# Altium PCB WikiTFT-2.8.PcbDoc
Units mil, origin at the board's own origin, x right, y up, seen from the top; angles counter-clockwise.
Board outline 3945 x 3915 mil, 2 copper layers (Top Layer, Bottom Layer); 22 components, 48 nets, 171 pads, 141 vias.
Unrouted connection lines stored in the file: 35.
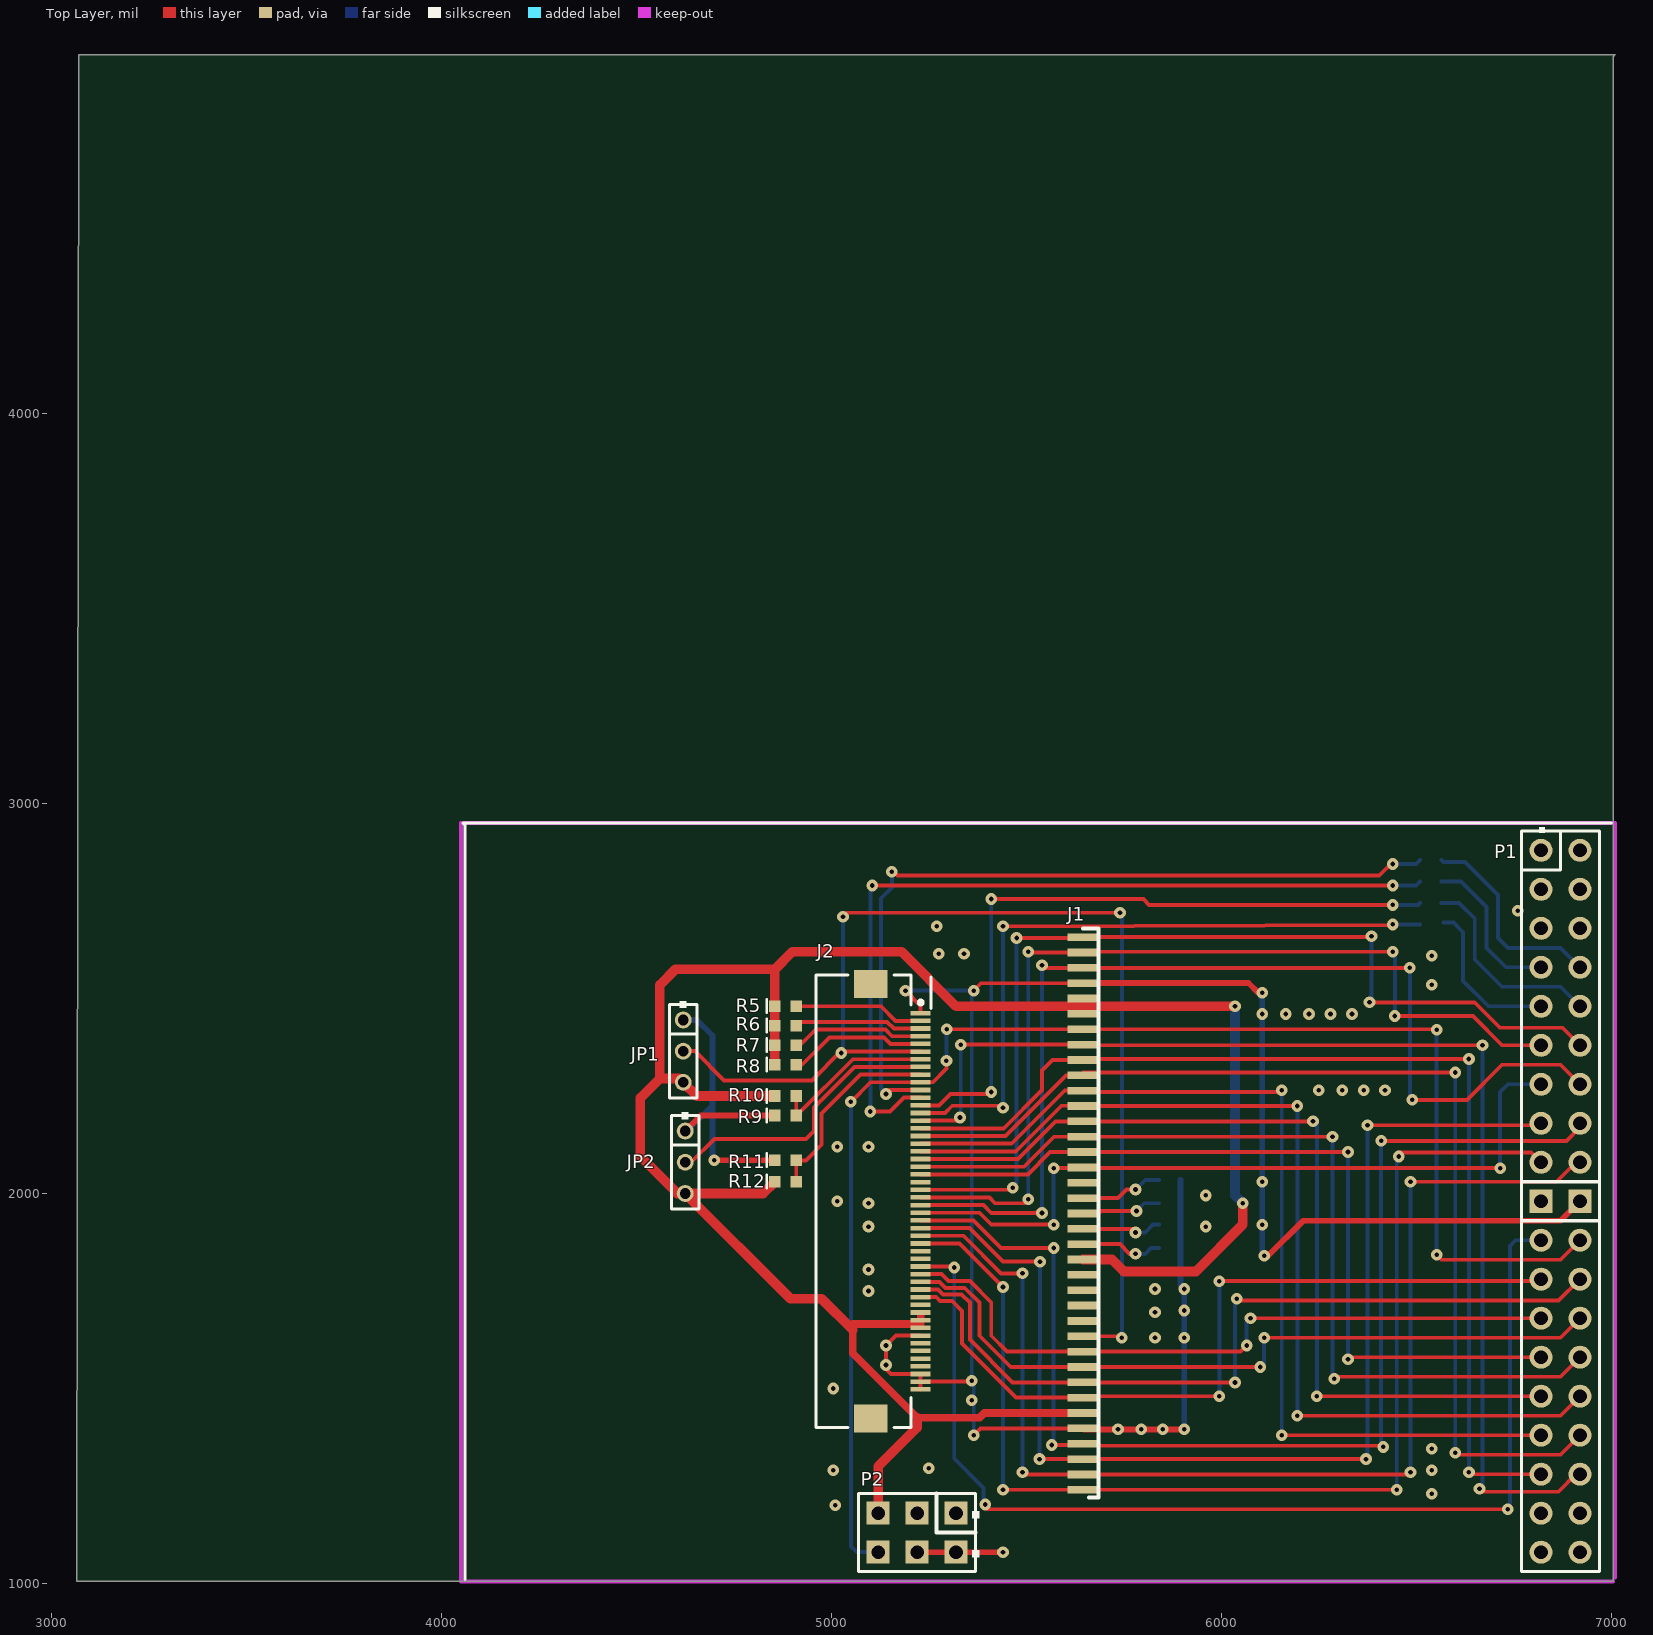
[diagram p0: Top Layer view]
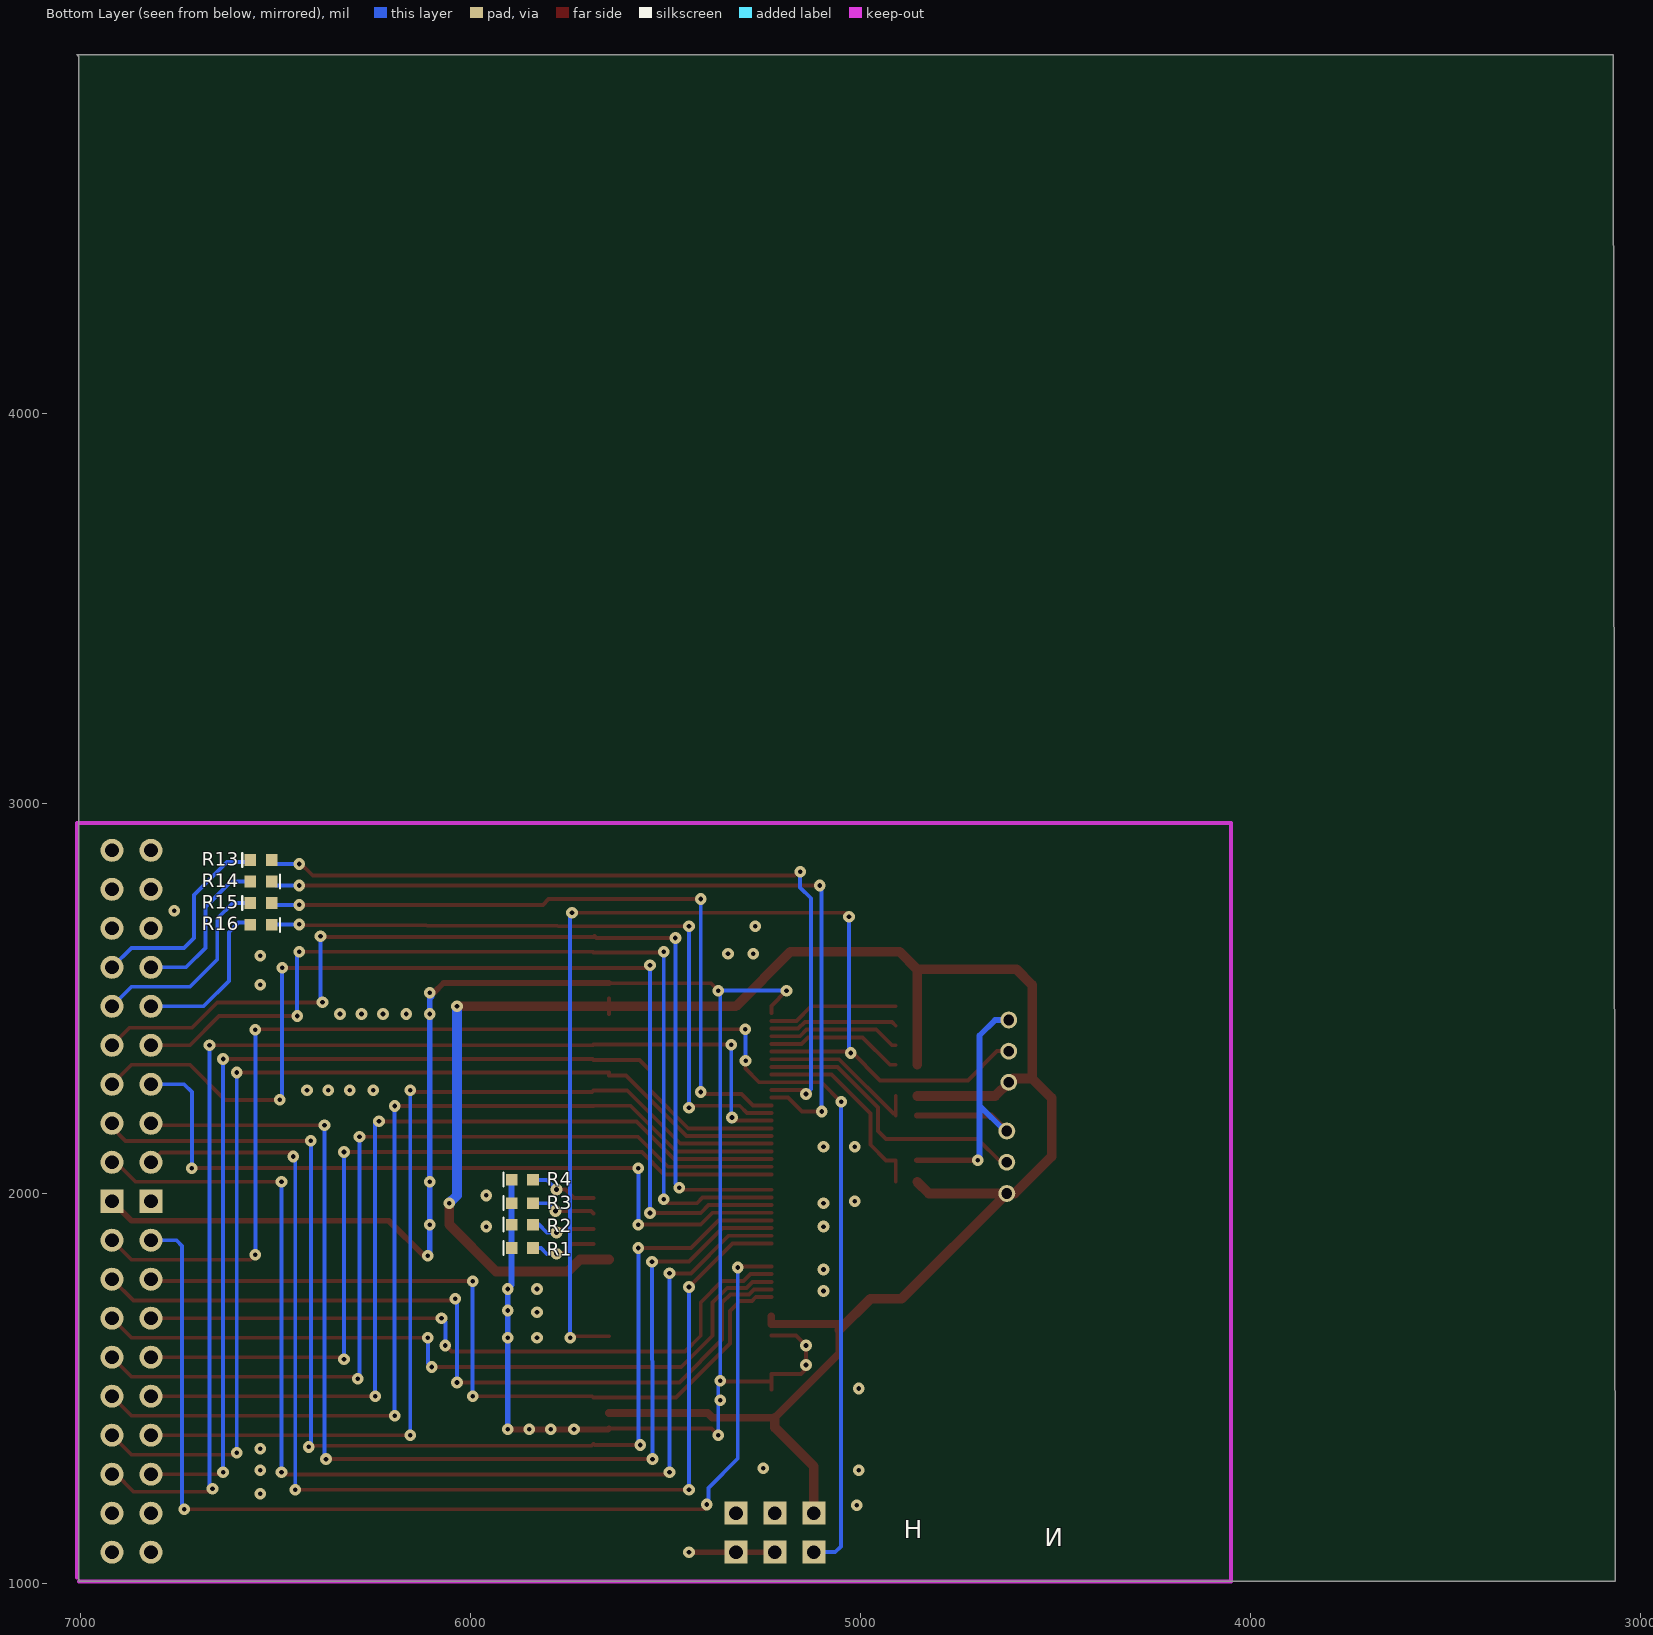
[diagram p1: Bottom Layer view, seen from below]

## Layer stack, top to bottom
Top Solder: solder mask 0.4, Solder Resist, Dk 3.5
Top Layer: signal copper 1.4
Dielectric1: dielectric 12.6, FR-4, Dk 4.8
Bottom Layer: signal copper 1.4
Bottom Solder: solder mask 0.4, Solder Resist, Dk 3.5

## Board outline
3070,4920 7010,4920 7005,4915 7005,1005 3065,1005

## Design rules (kind name [scope] priority, off if disabled: settings)
Clearance [All] p1: gap=7
PolygonConnect [All] p1: connectstyle=Relief reliefconductorwidth=10 reliefentries=4 polygonreliefangle="90 Angle" airgapwidth=10
RoomDefinition TFT [InComponentClass('TFT')] p1: confinementstyle=ConfineIn formatcopy=TRUE lockcomponents=FALSE outline 4060,1005 6995,1005 6995,2955 4060,2955
RoutingVias [All] p1: holewidth=28 width=50 viastyle="Through Hole" minholewidth=10 minwidth=20 maxholewidth=12 maxwidth=30
SolderMaskExpansion [All] p1: expansion=4
UnpouredPolygon [All] p1: allowunpoured=FALSE
Width [All] p1: maxlimit=25 minlimit=10 preferedwidth=12 minimp=50.000000 maximp=50.000000 favimp=50.000000
29 further rules are at their usual default settings.

## Components (designator, comment, footprint, x,y, rotation, side; value= is the part's Value field where it differs from the comment)
J1 "TFT-2.8-240x320-i9320" TFT-PIN37-1.0MM 5645,1240 r90 top
J2 "TFT-2.8-240x320-i9341" FPC-0.5-PIN50 5165,1980 r270 top
JP1 "Jumper3" HDR1X3/2.00mm 4620,2445 r270 top
JP2 "Jumper3" HDR1X3/2.00mm 4625,2160 r270 top
P1 "WIKIGPIO-FULL" WIKIGPIO-FULL 6820,2880 r270 top
P2 "WIKIPWR" WIKIPWR 5320,1180 r180 top
R1 "NA" 0603M 5895,1860 r180 bottom
R2 "NA" 0603M 5895,1920 r180 bottom
R3 "NA" 0603M 5895,1975 r180 bottom
R4 "NA" 0603M 5895,2035 r180 bottom
R5 "NA" 0603M 4855,2480 r0 top
R6 "NA" 0603M 4855,2430 r0 top
R7 "NA" 0603M 4855,2380 r0 top
R8 "NA" 0603M 4855,2330 r0 top
R9 "NA" 0603M 4855,2200 r0 top
R10 "NA" 0603M 4855,2250 r0 top
R11 "NA" 0603M 4855,2085 r0 top
R12 "NA" 0603M 4855,2030 r0 top
R13 "NA" 0603M 6565,2855 r180 bottom
R14 "NA" 0603M 6510,2800 r0 bottom
R15 "NA" 0603M 6565,2745 r180 bottom
R16 "NA" 0603M 6510,2689.13 r0 bottom

## Footprints (in the part's own frame and the unit in brackets; to place one, negate y for a bottom-side part, rotate by r counter-clockwise, add the part's x,y. Pads: shape width x height; smd on the part's side, far side on the other; paste and mask are expansions set on the pad)
0603M [mil]
  rect 30x30 smd: 1(0,0) 2(55,0)
  silkscreen extent -21,-17 -21,18, body extent -5,-15 60,15, height 43
FPC-0.5-PIN50 [mm] "Connector; FH12 Series; 50 Position; 0.5mm Spaced Top Contact"
  rect 0.3x1.3 smd: 1(-12.25,1.625) 2(-11.75,1.625) 3(-11.25,1.625) 4(-10.75,1.625) 5(-10.25,1.625) 6(-9.75,1.625) 7(-9.25,1.625) 8(-8.75,1.625) 9(-8.25,1.625) 10(-7.75,1.625) 11(-7.25,1.625) 12(-6.75,1.625) 13(-6.25,1.625) 14(-5.75,1.625) 15(-5.25,1.625) 16(-4.75,1.625) 17(-4.25,1.625) 18(-3.75,1.625) 19(-3.25,1.625) 20(-2.75,1.625) 21(-2.25,1.625) 22(-1.75,1.625) 23(-1.25,1.625) 24(-0.75,1.625) 25(-0.25,1.625) 26(0.25,1.625) 27(0.75,1.625) 28(1.25,1.625) 29(1.75,1.625) 30(2.25,1.625) 31(2.75,1.625) 32(3.25,1.625) 33(3.75,1.625) 34(4.25,1.625) 35(4.75,1.625) 36(5.25,1.625) 37(5.75,1.625) 38(6.25,1.625) 39(6.75,1.625) 40(7.25,1.625) 41(7.75,1.625) 42(8.25,1.625) 43(8.75,1.625) 44(9.25,1.625) 45(9.75,1.625) 46(10.25,1.625) 47(10.75,1.625) 48(11.25,1.625) 49(11.75,1.625) 50(12.25,1.625)
  rect 1.8x2.2 smd: 51(14.15,-1.625) 52(-14.15,-1.625)
  silkscreen extent -14.75,-5.2 14.75,1.75
HDR1X3/2.00mm [mm]
  round 1.1 hole 0.7: 1(0,0) 2(2.032,0) 3(4.064,0)
  silkscreen extent -1.24,-0.89 5.08,0.89
TFT-PIN37-1.0MM [mm]
  rect 0.5x2 smd: 1(0,0) 2(1,0) 3(2,0) 4(3,0) 5(4,0) 6(5,0) 7(6,0) 8(7,0) 9(8,0) 10(9,0) 11(10,0) 12(11,0) 13(12,0) 14(13,0) 15(14,0) 16(15,0) 17(16,0) 18(17,0) 19(18,0) 20(19,0) 21(20,0) 22(21,0) 23(22,0) 24(23,0) 25(24,0) 26(25,0) 27(26,0) 28(27,0) 29(28,0) 30(29,0) 31(30,0) 32(31,0) 33(32,0) 34(33,0) 35(34,0) 36(35,0) 37(36,0)
  silkscreen extent -0.51,-1.02 36.58,0
WIKIGPIO-FULL [mm] "Connector; Header; 19x2 Position"
  round 1.5 hole 0.9: 1(0,0) 2(0,2.54) 3(2.54,0) 4(2.54,2.54) 5(5.08,0) 6(5.08,2.54) 7(7.62,0) 8(7.62,2.54) 9(10.16,0) 10(10.16,2.54) 11(12.7,0) 12(12.7,2.54) 13(15.24,0) 14(15.24,2.54) 15(17.78,0) 16(17.78,2.54) 17(20.32,0) 18(20.32,2.54) 21(25.4,0) 22(25.4,2.54) 23(27.94,0) 24(27.94,2.54) 25(30.48,0) 26(30.48,2.54) 27(33.02,0) 28(33.02,2.54) 29(35.56,0) 30(35.56,2.54) 31(38.1,0) 32(38.1,2.54) 33(40.64,0) 34(40.64,2.54) 35(43.18,0) 36(43.18,2.54) 37(45.72,0) 38(45.72,2.54)
  rect 1.5x1.5 hole 0.9: 19(22.86,0) 20(22.86,2.54)
  silkscreen extent -1.52,-1.27 46.99,3.81
WIKIPWR [mm] "Connector; Header; 3x2 Position"
  rect 1.5x1.5 hole 0.9: 1(0,0) 2(0,2.54) 3(2.54,0) 4(2.54,2.54) 5(5.08,0) 6(5.08,2.54)
  silkscreen extent -1.52,-1.27 6.35,3.81

## Part data
J1: "i9320-240x320"
J2: library part TFT-2.8-240x320-i9341-PIN50-FPC
P1: "Header, 19-Pin, Dual row"
P2: "PWR HDR"
R1 R2 R3 R4 R5 R6 R7 R8 R9 R10 R11 R12 R13 R14 R15 R16: library part Res, "Resistor"

## Via types
v1: diameter 30, hole 12, Top Layer to Bottom Layer, 141 vias

## Nets (pads, with @x,y where several pads share a name; then routed paths per layer and width w, separated by ;. In a path a pad name is that pad's centre, name@x,y a point inside that pad or via, vN(x,y) a via of type N, cw(c..) or ccw(c..) an arc to the next point about the centre after c; other vN are vias at no path point)
DE: J2.14 R16.1 | length 1775.3
  Top Layer w10: J2.14 5291.38,2206.38 5310,2225 v1@5434.6,2225 ; v1@5429.63,2220.4 v1@5434.6,2225 ; v1(5440,2685) v1@6450,2688.9 ; v1@5434.6,2225 5435,2225 5440,2230 5435.01,2225.38 v1@5434.6,2225
  Bottom Layer w10: v1(5440,2220) v1(5440,2685) ; v1@6445,2690 6509.13,2690 R16.1
  other v1: 6440,2690
DOTCLK: J2.13 R15.2 | length 1801.3
  Top Layer w10: J2.13 5276.06,2226.06 5305,2255 5410,2255 v1(5410,2260) ; v1(5410,2755) 5800,2755 5815,2740 v1@6445,2740
  Bottom Layer w10: v1(5410,2260) v1(5410,2755) ; v1@6445,2740 6505,2740 R15.2
  other v1: 6440,2740
GND: J1.5 J1.34 J2.1 J2.43 J2.48 J2.49 J2.50 JP1.1 JP2.1 P1.20 P2.2 P2.4 R1.1 R2.1 R3.1 R4.1 R9.1 R11.1 | length 6438.7
  Top Layer w10: v1(5190,2520) 5228.98,2481.02 J2.1 ; J2.50 J2.49 ; J2.43 5165.51,1635.51 v1(5140,1610) 5140,1550 5152.91,1537.09 J2.48 J2.49 ; v1(5360,1520) 5357.4,1517.4 J2.49 ; v1(5365,1380) 5382.48,1397.48 J1.5 ; v1(5365,2520) 5384.21,2539.21 J1.34
  Top Layer w15: JP2.1 4665,2200 R9.1 ; v1(4700,2085) R11.1 ; P2.4 P2.2 v1(5440,1080) ; J1.5 5647.48,1395 v1(5905,1395) ; J1.34 5645.79,2540 6070,2540 6095,2515 v1(6105,2515) ; v1(6110,1840) 6120,1840 6210,1930 6870,1930 P1.20
  Bottom Layer w10: v1(5190,2520) v1@5370,2520 ; v1@5360,2510 v1(5360,1520) 5365,1515 v1(5365,1380)
  Bottom Layer w15: JP1.1 4655,2445 4695,2405 4695,2225 ; JP2.1 4630,2160 4695,2225 ; v1(4700,2085) 4695,2090 4695,2225 ; R4.1 R3.1 R2.1 R1.1 5895,1765 v1(5905,1755) v1(5905,1700) v1(5905,1630) v1@5905,1400 ; v1(6105,2515) 6105,2510 6100,2505 6105,2500 6105,1845 v1(6110,1840)
  other v1: 5010,1200 6540,1230 5005,1290 6540,1290 5250,1295 6540,1345 5735,1395 5795,1395 5850,1395 5360,1470 5005,1500 5140,1560 5830,1630 5830,1695 5095,1750 5830,1755 5095,1805 5095,1915 5960,1915 6105,1920 5095,1975 5015,1980 5960,1995 6105,2030 5015,2120 5095,2120 6250,2265 6310,2265 6365,2265 6420,2265 6105,2460 6165,2460 6225,2460 6280,2460 6335,2460 6540,2535 6540,2610 5275,2615 5340,2615 5270,2685 6760,2725
HSYNC: J2.12 R14.1 | length 2135
  Top Layer w10: v1(5100,2210) 5150,2210 5185.75,2245.75 J2.12 ; v1(5105,2790) v1(6440,2790)
  Bottom Layer w10: v1(5100,2210) 5100,2785 v1(5105,2790) ; v1(6440,2790) 6500,2790 R14.1
IM0: J1.11 J2.6 JP1.2 | length 2937.5
  Top Layer w10: JP1.2 4650,2365 4725,2290 4950,2290 5023.86,2363.86 J2.6 ; v1(5030,2710) 5040,2720 v1(5740,2720) ; J1.11 5736.3,1633.7 5740,1630 v1(5745,1630)
  Bottom Layer w10: v1(5025,2360) 5020,2360 5030,2370 v1(5030,2710) ; v1(5740,2720) 5745,2715 v1(5745,1630)
IM1: J2.7 R9.2 R10.2 | length 426.6
  Top Layer w10: R9.2 R9.2@4910,2205 ; R10.2 R9.2@4910,2205 ; J2.7 5055.13,2344.17 4915.96,2205 R9.2@4910,2205
IM2: J2.8 JP2.2 | length 740.4
  Top Layer w10: JP2.2 4640,2080 4700,2140 4935,2140 4955,2160 4955,2220 5059.49,2324.49 J2.8
IM3: J2.9 R11.2 R12.2 | length 511.9
  Top Layer w10: R12.2 R11.2 4935,2085 4975,2125 4975,2205 5074.8,2304.8 J2.9
NetJ1_17: J1.17 R1.2 | length 171.5
  Top Layer w10: 5685,1869.92 5740.08,1869.92 5765,1845 v1(5780,1845)
  Bottom Layer w10: v1(5780,1845) 5805,1845 5820,1860 R1.2
NetJ1_18: J1.18 R2.2 | length 167.1
  Top Layer w10: 5685,1909.29 5770.71,1909.29 v1(5780,1900)
  Bottom Layer w10: v1(5780,1900) 5805,1900 5825,1920 R2.2
NetJ1_19: J1.19 R3.2 | length 173.4
  Top Layer w10: 5685,1948.66 5691.34,1955 v1(5782.5,1955)
  Bottom Layer w10: v1@5790,1955 v1(5782.5,1955) 5802.5,1975 R3.2
NetJ1_20: J1.20 R4.2 | length 177
  Top Layer w10: 5685,1988.03 5735,1988.03 5756.97,2010 v1(5780,2010) ; v1@5782.5,2010 v1@5782.5,2012.5
  Bottom Layer w10: v1(5780,2010) 5805,2035 R4.2
NetJ2_2: J2.2 R5.2 | length 334.5
  Top Layer w10: R5.2 5127.12,2480 5164.53,2442.6 J2.2
NetJ2_3: J2.3 R6.2 | length 330.2
  Top Layer w10: R6.2 4920,2440 5143.08,2440 5160.17,2422.91 J2.3
NetJ2_4: J2.4 R7.2 | length 342.5
  Top Layer w10: R7.2 4920,2380 4960,2420 5139.04,2420 5155.81,2403.23 J2.4
NetJ2_5: J2.5 R8.2 | length 354.8
  Top Layer w10: R8.2 4925,2330 4995,2400 5135,2400 5151.46,2383.54 J2.5
NetP1_7: P1.7 R14.2 | length 407.6
  Bottom Layer w10: R14.2 6615,2800 6680,2735 6680,2630 6730,2580 P1.7
NetP1_8: P1.8 R13.1 | length 533.3
  Bottom Layer w10: R13.1 6570,2850 6625,2850 6710,2765 6710,2655 6735,2630 6870,2630 P1.8
NetP1_9: P1.9 R16.2 | length 412.3
  Bottom Layer w10: R16.2@6570,2695 6595,2695 6620,2670 6620,2545 6685,2480 P1.9
NetP1_10: P1.10 R15.1 | length 526.3
  Bottom Layer w10: R15.1 6610,2745 6650,2705 6650,2600 6720,2530 6870,2530 P1.10
PDVDD: J1.6 J1.16 J1.32 J1.33 J2.40 J2.41 J2.42 JP1.3 JP2.3 P2.5 R5.1 R6.1 R7.1 R8.1 R10.1 R12.1 | length 5858
  Top Layer w10: J1.32 5645,2480 J1.33
  Top Layer w20: 5228.98,1685 J2.41 5228.98,1665 5055,1665 5055,1650 5055,1590 5220,1425 5380,1425 5391.85,1436.85 J1.6
  Top Layer w25: R12.1 4825,2000 JP2.3 ; R10.1 4655,2250 JP1.3 4610,2295 4560,2295 ; R8.1 R7.1 R6.1 R5.1 4855,2575 ; 5055,1650 4975,1730 4895,1730 JP2.3 ; P2.5 5120,1300 5220,1400 5220,1425 ; J1.16 5719.45,1830.55 5750,1800 5935,1800 6055,1920 v1(6055,1975) ; v1(6035,2480) 5645,2480 5320,2480 5180,2620 4900,2620 4855,2575 ; 4560,2295 4510,2245 4510,2095 4605,2000 JP2.3 ; 4560,2295 4560,2535 4600,2575 4855,2575
  Bottom Layer w25: v1(6035,2480) 6035,1995 v1(6055,1975)
TFT_CS: J1.7 J2.38 P1.23 | length 2043.5
  Top Layer w10: J2.38 5268.94,1733.94 5278.88,1724 5310,1724 5335,1699 5335,1615 5473.78,1476.22 5685,1476.22 5688.78,1480 v1(5995,1480) ; v1(5995,1775) P1.23@6820,1775
  Bottom Layer w10: v1(5995,1480) v1(5995,1775)
TFT_DA00: J1.1 J2.31 P1.17 | length 3036.8
  Top Layer w10: J2.31 5328.27,1871.73 v1(5440,1760) ; v1(5440,1240) v1(6450,1240) ; v1(6455,2095) 6455,2105 6795,2105 P1.17
  Bottom Layer w10: v1(5440,1240) 5440,1755 5435,1760 v1(5440,1760) ; v1(6450,1240) 6450,2090 v1(6455,2095)
TFT_DA01: J1.2 J2.30 P1.18 | length 3020.8
  Top Layer w10: J2.30 5338.58,1891.42 5435,1795 v1(5490,1795) ; v1(5490,1285) 5490,1283.74 5485.63,1279.37 J1.2 6479.37,1279.37 v1(6485,1285) ; v1(6485,2030) 6860,2030 6910,2080 P1.18
  Bottom Layer w10: v1(5490,1285) v1(5490,1795) ; v1(6485,1285) v1(6485,2030)
TFT_DA02: J1.3 J2.29 P1.15 | length 2996.7
  Top Layer w10: J2.29 5353.9,1911.1 5440,1825 v1(5535,1825) ; v1(5533.74,1318.74) v1(6371.26,1318.74) ; v1(6375,2175) P1.15@6820,2175
  Bottom Layer w10: v1(5533.74,1318.74) v1(5535,1825) v1@5535,1815 ; v1(6371.26,1318.74) v1@6371.26,1322.48 ; v1@6375,1322.48 v1(6375,2175)
TFT_DA03: J1.4 J2.28 P1.16 | length 3049.2
  Top Layer w10: J2.28 5364.21,1930.79 5435,1860 v1(5570,1860) ; v1(5565,1355) J1.4@5681.89,1355 ; 5685,1358.11 5690.11,1353 6412,1353 v1(6415,1350) ; v1(6410,2135) 6885,2135 6920,2170 P1.16
  Bottom Layer w10: v1(5565,1355) 5570,1360 v1(5570,1860) ; v1(6410,2135) 6410,1355 v1(6415,1350)
TFT_DA04: J1.22 J2.27 P1.13 | length 1951.9
  Top Layer w10: J2.27 5379.53,1950.47 5410,1920 v1(5570,1920) ; v1(5570,2065) v1(6715,2065)
  Bottom Layer w10: v1(5570,1920) v1(5570,2065) ; v1(6715,2065) 6715,2260 6735,2280 P1.13
TFT_DA05: J1.35 J2.26 P1.14 | length 2741.4
  Top Layer w10: J2.26 5389.84,1970.16 5410,1950 5525,1950 5530,1955 v1(5540,1950) ; v1(5540,2585) 5536.42,2578.58 v1(6483.58,2578.58) ; v1(6490,2240) 6630,2240 6720,2330 6870,2330 P1.14
  Bottom Layer w10: v1(5540,1950) v1(5540,2585) ; v1(6483.58,2578.58) 6483.58,2246.42 v1(6490,2240)
TFT_DA06: J1.36 J2.25 P1.11 | length 2449.4
  Top Layer w10: J2.25 5405.16,1989.84 5420,1975 5495,1975 v1(5505,1985) ; v1(5505,2620) 5497.05,2617.95 5685,2617.95 5687.05,2620 v1(6440,2620) ; v1(6445,2455) 6645,2455 6720,2380 P1.11
  Bottom Layer w10: v1(5505,1985) v1(5505,2620) ; v1(6440,2620) 6445,2620 v1(6445,2455)
TFT_DA07: J1.37 J2.24 P1.12 | length 2562.1
  Top Layer w10: J2.24 v1@5465,2009.53 ; v1(5475,2655) 5677.32,2655 5682.32,2660 5685,2657.32 6382.32,2657.32 v1(6385,2660) ; v1(6380,2490) 6650,2490 6715,2425 6875,2425 P1.12
  Bottom Layer w10: v1(5465,2015) 5475,2025 v1(5475,2655) ; v1(6380,2490) 6385,2485 v1(6385,2660)
TFT_DB00: J1.23 J2.22 P1.27 | length 2157.9
  Top Layer w10: J2.22 5503.9,2048.9 5561.14,2106.14 v1(6325,2106.14) v1@6335,2106.14 ; v1(6325,1575) 6330,1580 P1.27
  Bottom Layer w10: v1(6325,1575) v1(6325,2106.14)
TFT_DB01: J1.24 J2.21 P1.28 | length 2363.3
  Top Layer w10: J2.21 5493.58,2068.58 5570.51,2145.51 v1(6285,2145.51) ; v1(6290,1525) 6295,1530 6870,1530 P1.28
  Bottom Layer w10: v1(6285,2145.51) 6285,1530 v1(6290,1525)
TFT_DB02: J1.25 J2.20 P1.29 | length 2333.1
  Top Layer w10: J2.20 5478.27,2088.27 5574.88,2184.88 J1.25 v1(6235,2184.88) ; v1(6245,1480) P1.29
  Bottom Layer w10: v1(6235,2184.88) 6240.12,2184.88 6245,2180 v1(6245,1480)
TFT_DB03: J1.26 J2.19 P1.30 | length 2554.8
  Top Layer w10: J2.19 5472.95,2107.95 5590,2225 5684.25,2225 5685,2224.25 v1(6195,2224.25) ; v1(6195,1430) 6870,1430 P1.30
  Bottom Layer w10: v1(6195,1430) v1(6195,2224.25)
TFT_DB04: J1.27 J2.18 P1.31 | length 2533.8
  Top Layer w10: J2.18 5462.64,2127.64 5598.62,2263.62 J1.27 5685,2263.62 5688.62,2260 v1@6155,2260 ; v1(6155,1380) P1.31
  Bottom Layer w10: v1(6155,1380) v1(6155,2265)
TFT_DB05: J1.28 J2.17 P1.32 | length 2753.3
  Top Layer w10: J2.17 5446.37,2147.32 5602.03,2302.99 J1.28 ; J1.28@5645,2310 v1(6600,2310) ; v1(6600,1335) 6605,1330 6870,1330 P1.32
  Bottom Layer w10: v1(6600,1335) v1(6600,2310)
TFT_DB06: J1.29 J2.16 P1.33 | length 2756.1
  Top Layer w10: J2.16 5442.01,2167.01 5540,2265 5540,2315 5567.36,2342.36 J1.29 5685,2342.36 5687.64,2345 v1(6635,2345) ; v1(6635,1285) 6640,1280 P1.33
  Bottom Layer w10: v1(6635,1285) v1(6635,2345)
TFT_DB07: J1.30 J2.15 P1.34 | length 3072.3
  Top Layer w10: J2.15 5328.31,2186.69 5330,2188.39 v1(5330,2195) ; v1(5331.73,2381.73) 5685,2381.73 5686.73,2380 v1(6670,2380) ; v1@6662,1235 6865,1235 6910,1280 P1.34
  Bottom Layer w10: v1(5330,2195) 5330,2186.73 5331.73,2185 v1(5331.73,2381.73) ; v1(6662,1243) 6663,1243 6670,1250 v1(6670,2380)
TFT_DC/SCL: J1.8 J2.37 P1.24 | length 2092.4
  Top Layer w10: J2.37 5273.29,1753.62 5285.92,1741 5334,1741 5355,1720 5355,1625 5464.41,1515.59 6034.41,1515.59 v1(6035,1515) ; v1(6040,1730) 6045,1725 6865,1725 P1.24
  Bottom Layer w10: v1(6035,1515) 6035,1735 v1(6040,1730)
TFT_RD: J1.10 J2.35 P1.25 | length 1793.7
  Top Layer w10: J2.35 5282.01,1792.99 5300,1775 5355,1775 5410,1720 5410,1635 5450.67,1594.33 6049.33,1594.33 v1(6065,1610) ; v1(6075,1680) P1.25
  Bottom Layer w10: v1(6065,1610) 6065,1670 v1(6075,1680)
TFT_RST: J1.31 J2.10 P1.22 P2.6 | length 3825.5
  Top Layer w10: v1(5050,2235) 5100.12,2285.12 J2.10 5260.12,2285.12 5295,2320 v1(5295,2340) ; v1(5296.1,2421.1) 6551.1,2421.1 v1(6552.2,2420) ; v1(6552.2,1842.8) 6565,1830 6870,1830 P1.22
  Bottom Layer w10: v1(5050,2235) 5050,1095 5065,1080 P2.6 ; v1(5295,2340) 5295,2420 v1(5296.1,2421.1) ; v1(6552.2,1842.8) v1(6552.2,2420)
TFT_SDI: J2.34 P1.21 | length 2844
  Top Layer w10: J2.34 5312.32,1812.68 v1(5315,1810) ; v1(5395,1202.5) 5395,1195 5400,1190 v1(6735,1190)
  Bottom Layer w10: v1(5315,1810) 5315,1320 5390,1245 v1@5390,1195 ; v1@6740,1190 6740,1865 6755,1880 P1.21
TFT_WR/SCL: J1.9 J2.36 P1.26 | length 1921.1
  Top Layer w10: J2.36 5277.65,1773.31 5292.96,1758 5342,1758 5380,1720 5380,1635 5460.04,1554.96 v1(6100,1555) v1(6100,1555) ; v1(6110,1630) 6870,1630 P1.26
  Bottom Layer w10: v1(6100,1555) 6110,1565 v1(6110,1630)
VSYNC: J2.11 R13.2 | length 2063
  Top Layer w10: v1(5140,2255) 5150.43,2265.43 J2.11 ; v1(5155,2825) 5160,2825 5170,2815 6405,2815 6440,2850 v1(6440,2845)
  Bottom Layer w10: v1(5140,2255) 5127.12,2267.88 5127.12,2757.12 5155,2785 v1(5155,2825) ; v1(6440,2845) 6500,2845 R13.2
XL: J1.14
XR: J1.12
YD: J1.15
YU: J1.13
pads on no net: J1.21 J2.23 J2.32 J2.33 J2.39 J2.44 J2.45 J2.46 J2.47 J2.51 J2.52 P1.1 P1.2 P1.3 P1.4 P1.5 P1.6 P1.19 P1.35 P1.36 P1.37 P1.38 P2.1 P2.3

## Keep-outs
Keep-Out Layer:
  lines w10: 7005,1005 4050,1005 4050,2950 7010,2950 7010,1015

## Silkscreen, mask and mechanical layers (free items; w line width, h text height)
Top Overlay:
  lines w7.87: 4060,1010 4060,2945 4055,2950 7000,2950 ; 5255,2475 5255,2555
Bottom Overlay:
  text "H" at 4890,1100 h80
  text "N" at 4480,1080 h80